# Altium PCB KEY.PcbDoc
Units mil, origin at the board's own origin, x right, y up, seen from the top; angles counter-clockwise.
Board outline 730.42 x 1605.42 mil, 2 copper layers (Top Layer, Bottom Layer); 11 components, 6 nets, 35 pads, 13 vias.
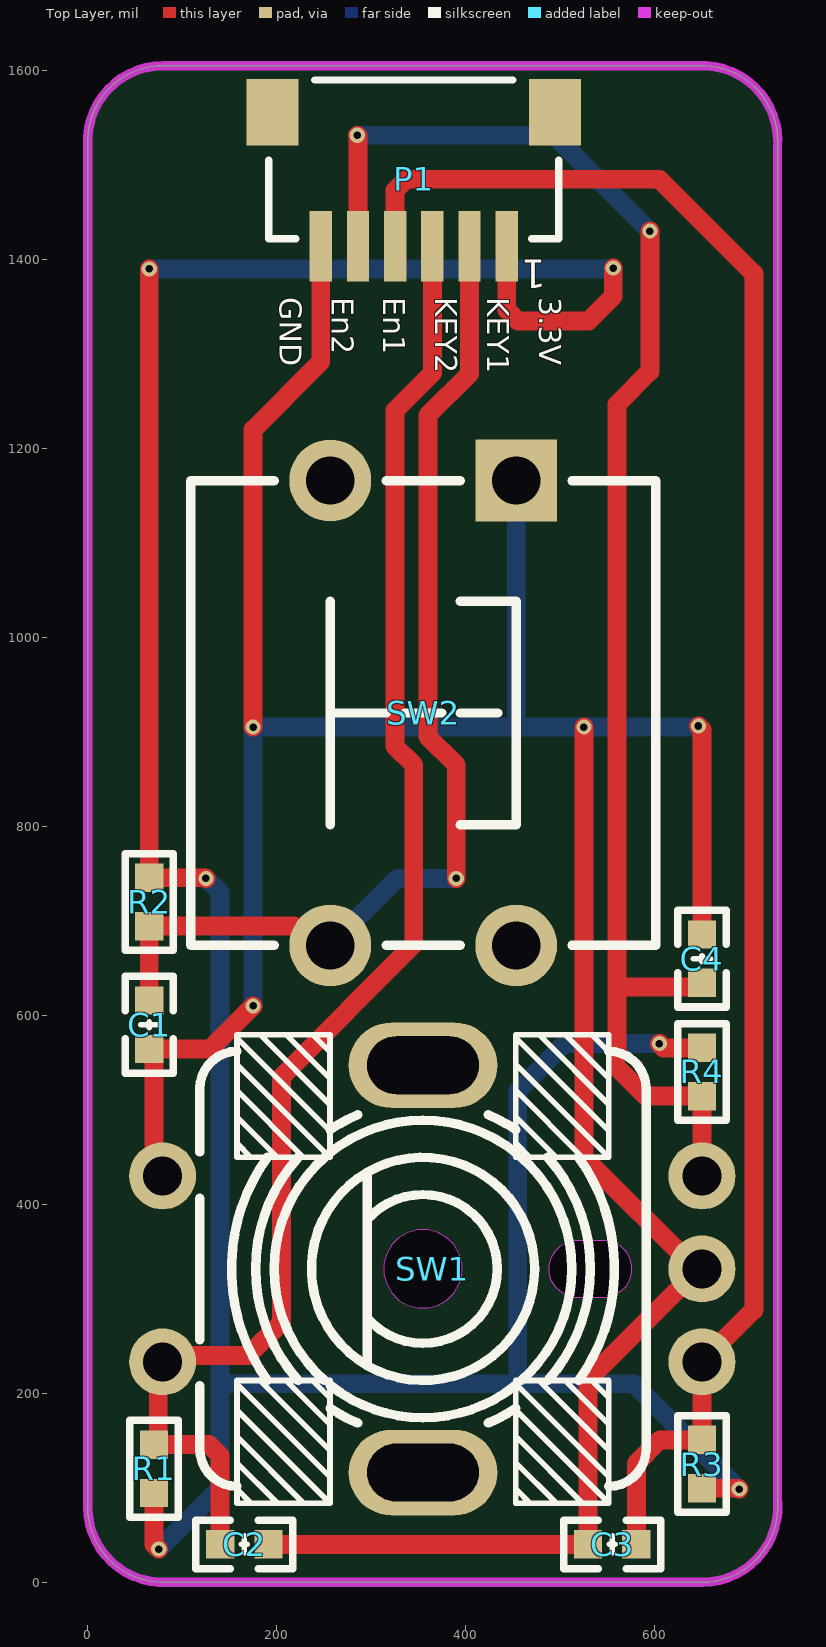
[diagram p0: Top Layer view]
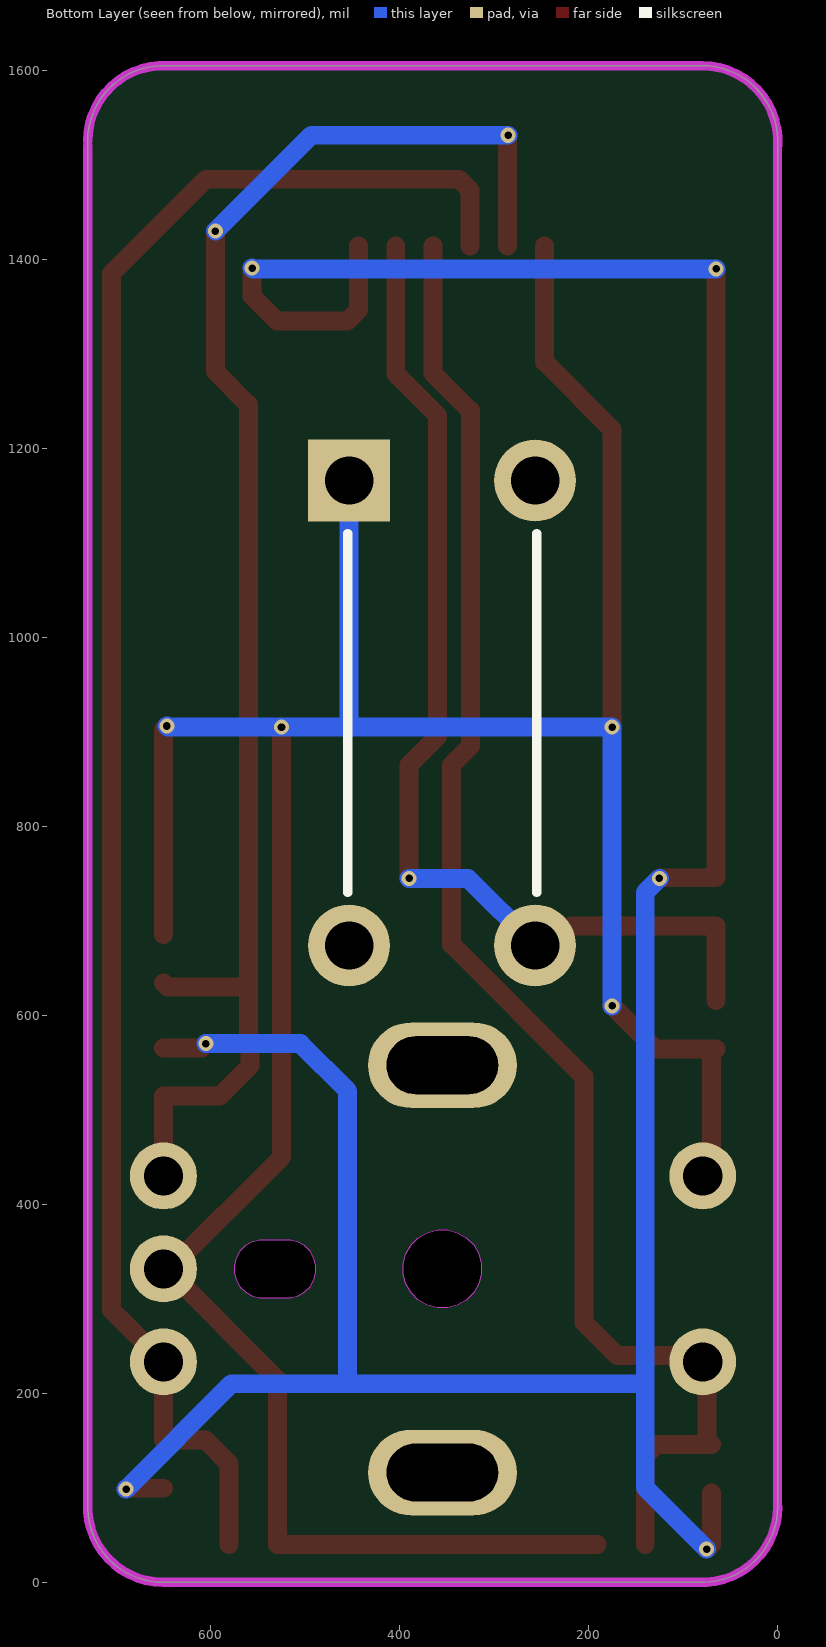
[diagram p1: Bottom Layer view, seen from below]
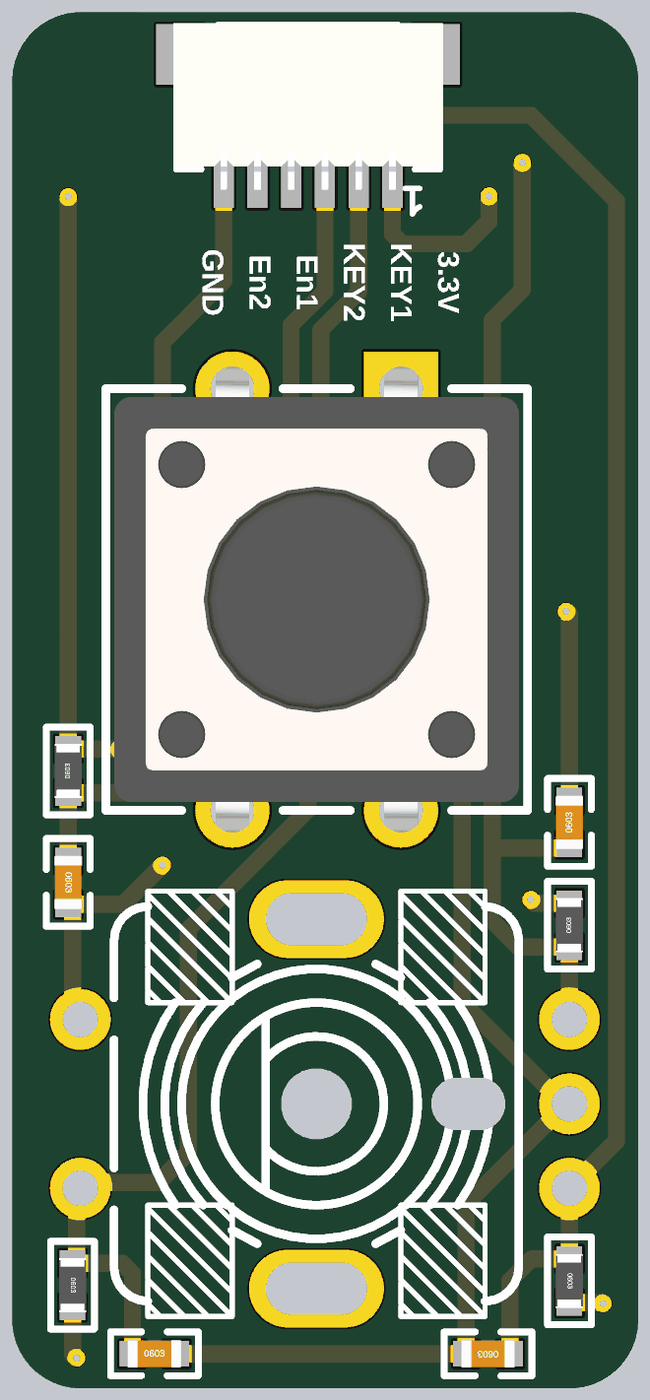
[diagram p2: 3D render of the assembled board from above, using the file's embedded part models]

## Layer stack, top to bottom
Top Solder: solder mask 0.4, Solder Resist, Dk 3.5
Top Layer: signal copper 1.4
Dielectric 1: dielectric 12.6, FR-4, Dk 4.8
Bottom Layer: signal copper 1.4
Bottom Solder: solder mask 0.4, Solder Resist, Dk 3.5

## Board outline
0,79.77 0,1520.51 -0.09,1520.51 cw(c79.77,1525.21) 79.77,1605.21 79.77,1605.12 645.49,1605.12 645.51,1605.09 cw(c650.21,1525.23) 730.21,1525.23 730,1520.61 730,85 730.09,84.49 cw(c650.23,79.79) 650.23,-0.21 650.23,0 84.49,0 84.49,-0.09 cw(c79.79,79.77)

## Design rules (kind name [scope] priority, off if disabled: settings)
Clearance 覆铜与导线距离 [OnLayer('Top Layer') vs InPolygon] p1: gap=10 ignorepadtopadclearanceinfootprint=FALSE
Clearance 板边距 [OnLayer('Keep-Out Layer') vs InPolygon] p2: gap=30 ignorepadtopadclearanceinfootprint=FALSE
Clearance [All] p3: gap=5 ignorepadtopadclearanceinfootprint=FALSE
ComponentClearance [All] p1: gap=0 collisioncheckmode=3 verticalgap=0 showdistances=FALSE
DiffPairsRouting [All] p1: maxlimit=9 minlimit=9 mostfreqgap=9 toplayer_minwidth=4 toplayer_maxwidth=4 toplayer_prefwidth=4 bottomlayer_minwidth=4 bottomlayer_maxwidth=4 bottomlayer_prefwidth=4 maxuncoupledlength=500
FanoutControl Fanout_BGA [All] p1: bgadir=Out bgaviamode=Centered fanoutstyle=Auto fanoutdirection=Alternating viagrid=1 // Fanout_BGA (Default Rule)
HoleSize [All] p1: absolutevalues=TRUE maxlimit=10000 minlimit=8 maxpercent=80.000 minpercent=20.000
MinimumSolderMaskSliver [All] p1 off: minsoldermaskwidth=2
PlaneConnect [All] p1: planeconnectstyle=Direct reliefexpansion=20 reliefentries=4 reliefconductorwidth=10 reliefairgap=10
PolygonConnect [All] p1: connectstyle=Direct reliefconductorwidth=10 reliefentries=4 polygonreliefangle="90 Angle" airgapwidth=10
RoutingVias [All] p1: holewidth=8 width=16 viastyle="Through Hole" minholewidth=6 minwidth=12 maxholewidth=200 maxwidth=200
SilkToSilkClearance [All] p1: silktosilkclearance=0
SilkToSolderMaskClearance [IsPad] p1: minsilkscreentomaskgap=0 clearancetoexposedcopper=TRUE
SolderMaskExpansion [All] p1: expansion=3 istentingtop=FALSE
Width [All] p1: maxlimit=10000 minlimit=4 preferedwidth=20 minimp=50.000000 maximp=50.000000 favimp=50.000000
22 further rules are at their usual default settings.

## Components (designator, comment, footprint, x,y, rotation, side; value= is the part's Value field where it differs from the comment)
C1 "0.1uF" C0603_L 65,590 r270 top
C2 "0.1uF" C0603_L 165.59,40 r0 top
C3 "0.1uF" C0603_L 555,40 r180 top
C4 "0.1uF" C0603_L 650,660 r90 top
P1 "SH1.0 6P" "SH 1.0-WS-6P" 345,1485 r180 top
R1 "10K" R0603_L 70,120 r270 top
R2 "10K" R0603_L 65,720 r90 top
R3 "10K" R0603_L 650,125 r270 top
R4 "10K" R0603_L 650,540 r90 top
SW1 "EC11K1524406" "SW-TH_EC11K1524406 - duplicate" 364.57,331.58 r90 top locked
SW2 "12x12x5" "SW DIP-12*12*4.3" 355,920 r270 top

## Footprints (in the part's own frame and the unit in brackets; to place one, negate y for a bottom-side part, rotate by r counter-clockwise, add the part's x,y. Pads: shape width x height; smd on the part's side, far side on the other; paste and mask are expansions set on the pad)
C0603_L [mil] "无极性贴片电容"
  rect 30x30 smd: 1(-25.59,0) 2(25.59,0)
  silkscreen extent -51,-26 51,26, body extent -31,-16 32,16, height 33
R0603_L [mil] "1/10W贴片电阻"
  rect 30x30 smd: 1(-25.59,0) 2(25.59,0)
  silkscreen extent -51,-26 51,26, body extent -31,-16 32,16, height 16
"SH 1.0-WS-6P" [mm]
  rect 1.4x1.8 smd: 0(-3.8,-1.8) 0(3.8,-1.8)
  rect 0.6x1.9 smd: 1(-2.5,1.8) 2(-1.5,1.8) 3(-0.5,1.8) 4(0.5,1.8) 5(1.5,1.8) 6(2.5,1.8)
  silkscreen extent -3.9,-2.67 3.9,1.6, body extent -4,-2.73 4,2.22, height 2.9
"SW DIP-12*12*4.3" [mm] "12*12*4.3mm                                 淘宝ID:黄晶宝石"
  rect 2.2x2.2 hole 1.3: 1(-6.25,2.5)
  round 2.2 hole 1.3: 2(-6.25,-2.5) 3(6.25,-2.5) 4(6.25,2.5)
  silkscreen extent -6.25,-6.25 6.25,6.25, body extent -6.9,-6 6.9,6, height 4.45
"SW-TH_EC11K1524406 - duplicate" [mm]
  round 1.8 hole 1.05 mask+0.051: A(-2.5,-7.25) B(2.5,-7.25) C(0,-7.25) D(-2.5,7.25) E(2.5,7.25)
  oval 2.3x4 hole 1.55 slot 3 at 90 deg copper offset 0,0 mask+0.051: MH1(-5.475,0.25)
  oval 2.3x4 hole 1.55 slot 3 at 90 deg mask+0.051: MH2(5.475,0.25)
  Keep-Out Layer board cut-out: 0.775,-4.575 0.775,-4.677 0.722,-4.874 0.62,-5.051 0.476,-5.195 0.299,-5.297 0.102,-5.35 -0.102,-5.35 -0.299,-5.297 -0.476,-5.195 -0.62,-5.051 -0.722,-4.874 -0.775,-4.677 -0.775,-4.575 -0.775,-4.575 -0.775,-3.925 -0.775,-3.823 -0.722,-3.626 -0.62,-3.449 -0.476,-3.305 -0.299,-3.203 -0.102,-3.15 0.102,-3.15 0.299,-3.203 0.476,-3.305 0.62,-3.449 0.722,-3.626 0.775,-3.823 0.775,-3.925 0.775,-3.925 0.775,-4.575
  Keep-Out Layer board cut-out: 1.05,0.25 1.05,0.388 0.978,0.655 0.84,0.895 0.645,1.09 0.405,1.228 0.138,1.3 -0.138,1.3 -0.405,1.228 -0.645,1.09 -0.84,0.895 -0.978,0.655 -1.05,0.388 -1.05,0.25 -1.05,0.112 -0.978,-0.155 -0.84,-0.395 -0.645,-0.59 -0.405,-0.729 -0.138,-0.8 0.138,-0.8 0.405,-0.729 0.645,-0.59 0.84,-0.395 0.978,-0.155 1.05,0.112 1.05,0.25 1.05,0.25
  silkscreen extent -6.3,-5.75 6.3,6.25

## Part data
C1 C2 C3 C4: library part C, "贴片电容", BOM名称=无极性贴片电容, 联系卖家，免费查找封装=唯一出售店铺网址https://shop463601444.taobao.com
P1: library part "Header 6", "Header, 6-Pin", LatestRevisionDate=17-Jul-2002, LatestRevisionNote="Re-released for DXP Platform.", Publisher="Altium Limited"
R1 R2 R3 R4: library part R, "贴片电阻", BOM名称=贴片电阻, 封装库来自淘宝卖家ID：黄晶宝石=其他店铺购入均为盗版假冒封装库，请立即申请退款, 联系卖家，免费查找封装=唯一出售店铺网址https://shop463601444.taobao.com
SW1: JLCPCB Part Class="Extended Part", LCSC Part Name=编码器, Manufacturer=ALPSALPINE(阿尔卑斯阿尔派), Add into BOM=yes, Convert to PCB=yes, Datasheet=https://atta.szlcsc.com/upload/public/pdf/source/20190620/C398934_DDD5BF6D843226194F24C74B1929B82F.pdf, Device=EC11K1524406, Manufacturer Part=EC11K1524406, Name=EC11K1524406, Supplier=LCSC, Supplier Footprint=插件, Supplier Part=C398934, Symbol=EC11K1524406
SW2: library part "TSW DIP-12x12", "直插12x12轻触开关", BOM名称=直插12x12轻触开关, 联系卖家，免费查找封装=唯一出售店铺网址https://shop463601444.taobao.com

## Via types
v1: diameter 16, hole 8, Top Layer to Bottom Layer, 13 vias

## Nets (pads, with @x,y where several pads share a name; then routed paths per layer and width w, separated by ;. In a path a pad name is that pad's centre, name@x,y a point inside that pad or via, vN(x,y) a via of type N, cw(c..) or ccw(c..) an arc to the next point about the centre after c; other vN are vias at no path point)
+3.3V: P1.1 R1.2 R2.2 R3.2 R4.2 | length 3389.4
  Top Layer w20: v1(65,1390) R2.2 124.41,745.59 v1(125,745) ; R1.2 70,40 v1(75,35) ; P1.1 443.43,1346.72 455.14,1335 530,1335 556.14,1361.14 v1(556.14,1390.96) ; v1(605,570) 609.41,565.59 R4.2 ; R3.2 688.6,99.41 v1(689.46,98.55)
  Bottom Layer w20: v1(65,1390) 555.18,1390 v1(556.14,1390.96) ; v1(75,35) 140,100 140,210 ; v1(125,745) 140,730 140,210 ; v1(605,570) 505,570 455,520 455,210 ; v1(689.46,98.55) 578.01,210 455,210 ; 140,210 455,210
Encode1: C3.1 P1.4 R3.1 SW1.A | length 1907.6
  Top Layer w20: P1.4 325.32,1473.28 337.03,1485 605,1485 705,1385 705,288.15 SW1.A R3.1 605.59,150.59 580.59,125.59 C3.1
Encode2: C4.1 P1.5 R4.1 SW1.B | length 1649.4
  Top Layer w20: v1(285.22,1531.58) 285.95,1530.85 P1.5 ; v1(595,1430) 595,1281.51 560,1246.51 560,630 ; SW1.B R4.1 590.59,514.41 558.28,546.72 558.28,563.28 560,565 560,630 ; C4.1 645.6,630 560,630
  Bottom Layer w20: v1(285.22,1531.58) 493.42,1531.58 v1(595,1430)
GND: C1.2 C2.2 C3.2 C4.2 P1.6 SW1.C SW1.E SW2.1 | length 3365.4
  Top Layer w20: SW1.E 70,439.15 70,559.41 C1.2 129.41,564.41 v1(175,610) ; v1(175,905) 175,1220 246.57,1291.57 P1.6 ; C2.2 C3.2 529.41,214.41 SW1.C@646.57,331.57 ; v1(525,905) 525,450 643.43,331.57 SW1.C@646.57,331.57 ; v1(646.25,906.25) 650,902.5 C4.2 ; SW1.C SW1.C@646.57,331.57
  Bottom Layer w20: v1(175,610) v1(175,905) 453.43,905 ; SW2.1 453.43,905 ; v1(646.25,906.25) 645,905 v1(525,905) 453.43,905
KEY1: C1.1 P1.2 R2.1 SW2.3 | length 1141.5
  Top Layer w20: C1.1 R2.1 218.08,694.41 238.55,673.94 SW2.3 ; v1(390,745) 390,865 360,895 360,1235 404.05,1279.06 P1.2
  Bottom Layer w20: SW2.3 327.64,745 v1(390,745)
KEY2: C2.1 P1.3 R1.1 SW1.D | length 1625.1
  Top Layer w20: C2.1 140,133.88 128.28,145.59 R1.1 74.57,150.17 74.57,228.57 SW1.D 86,240 170,240 205,275 205,535 345,675 345,865 325,885 325,1240 364.68,1279.69 P1.3
pads on no net: P1.0 SW1.MH1 SW1.MH2 SW2.2 SW2.4

## Keep-outs
Keep-Out Layer:
  lines w10: -0.21,79.77 ccw(c79.79,79.77) 84.49,-0.09 ; -0.09,1520.51 cw(c79.77,1525.21) 79.77,1605.21 ; 0,79.77 0,1520.51 ; 79.77,1605.12 645.49,1605.12 cw(c650.21,1525.23) 730.21,1525.23 ; 84.49,0 650.23,0 ; 650.23,-0.21 ccw(c650.23,79.79) 730.09,84.49 ; 730,85 730,1520.61

## Silkscreen, mask and mechanical layers (free items; w line width, h text height)
Top Overlay:
  text "GND" at 195,1360.19 h40 r270
  text "En2" at 250,1360.19 h40 r270
  text "En1" at 305,1360.19 h40 r270
  text "KEY2" at 360,1360 h40 r270
  text "KEY1" at 415,1360 h40 r270
  text "3.3V" at 470,1360 h40 r270
Mechanical 1:
  lines w10: -0.21,79.77 ccw(c79.79,79.77) 84.49,-0.09 84.49,0 650.23,0 650.23,-0.21 ccw(c650.23,79.79) 730.09,84.49 730,85 730,1520.61 730.21,1525.23 ccw(c650.21,1525.23) 645.51,1605.09 ; 0,79.77 0,1520.51 -0.09,1520.51 cw(c79.77,1525.21) 79.77,1605.21 79.77,1605.12 645.49,1605.12 ; 645.49,1605.12 645.51,1605.09 ; 313.39,326.14 316.21,315.63 321.65,306.2 329.35,298.5 338.78,293.06 349.29,290.24 354.73,290.24 360.17,290.24 370.69,293.06 380.11,298.5 387.81,306.2 393.25,315.63 396.07,326.14 396.07,337.02 393.25,347.54 387.81,356.96 380.11,364.66 370.69,370.1 360.17,372.92 354.73,372.92 349.29,372.92 338.78,370.1 329.35,364.66 321.65,356.96 316.21,347.54 313.39,337.02 313.39,326.14 ; 488.59,327.57 488.59,335.6 490.67,343.36 494.68,350.32 500.36,356 507.32,360.01 515.08,362.09 519.1,362.09 544.69,362.09 548.7,362.09 556.47,360.01 563.42,356 569.1,350.32 573.12,343.36 575.2,335.6 575.2,327.57 573.12,319.8 569.1,312.85 563.42,307.17 556.47,303.15 548.7,301.07 544.69,301.07 519.1,301.07 515.08,301.07 507.32,303.15 500.36,307.17 494.68,312.85 490.67,319.8 488.59,327.57
Drill Drawing:
  circle w10: c32.74,2259.09 r33.33
  lines w10: -0.6,2092.42 16.07,2092.42 32.74,2075.76 49.4,2092.42 66.07,2092.42 49.4,2109.09 66.07,2125.76 49.4,2125.76 32.74,2142.42 16.07,2125.76 -0.6,2125.76 16.07,2109.09 -0.6,2092.42 ; -0.6,2442.42 66.07,2442.42 32.74,2375.76 -0.6,2442.42 ; -0.6,2525.76 66.07,2525.76 66.07,2592.42 -0.6,2592.42 -0.6,2525.76
  lines w15: -60.39,2030.76 12877.99,2030.76 ; -60.39,2630.76 12877.99,2630.76 ; 490.49,1880.76 490.49,2780.76 ; 1030.35,1880.76 1030.35,2780.76 ; 2110.03,1880.76 2110.03,2780.76 ; 2615.91,1880.76 2615.91,2780.76 ; 3349.71,1880.76 3349.71,2780.76 ; 4849.26,1880.76 4849.26,2780.76 ; 5439.11,1880.76 5439.11,2780.76 ; 6184.91,1880.76 6184.91,2780.76 ; 6834.74,1880.76 6834.74,2780.76 ; 7688.5,1880.76 7688.5,2780.76 ; 9022.11,1880.76 9022.11,2780.76 ; 10355.72,1880.76 10355.72,2780.76 ; 11475.39,1880.76 11475.39,2780.76 ; -60.39,1880.76 12877.99,1880.76 12877.99,2780.76 -60.39,2780.76 -60.39,1880.76
  text "Symbol" at 29.61,2675.76 h72
  text "Count" at 535.49,2675.76 h72
  text "Hole Size" at 1075.35,2675.76 h72
  text "Plated" at 2155.03,2675.76 h72
  text "Hole Type" at 2660.91,2675.76 h72
  text "Drill Layer Pair" at 3394.71,2675.76 h72
  text "Via/Pad" at 4894.26,2675.76 h72
  text "Pad Shape" at 5484.11,2675.76 h72
  text "Template" at 6229.91,2675.76 h72
  text "Description" at 6879.74,2675.76 h72
  text "Hole Tolerance (+)" at 7733.5,2675.76 h72
  text "Hole Tolerance (-)" at 9067.11,2675.76 h72
  text "Hole Length" at 10400.72,2675.76 h72
  text "Routed Path Length" at 11520.39,2675.76 h72
  text "2" at 535.49,2525.76 h60
  text "61.02mil (1.550mm)" at 1075.35,2525.76 h60
  text "PTH" at 2155.03,2525.76 h60
  text "Slot" at 2660.91,2525.76 h60
  text "Top Layer - Bottom Layer" at 3394.71,2525.76 h60
  text "Pad" at 4894.26,2525.76 h60
  text "Rounded" at 5484.11,2525.76 h60
  text "(Mixed)" at 6229.91,2525.76 h60
  text "118.11mil (3.000mm)" at 10400.72,2525.76 h60
  text "57.09mil (1.450mm)" at 11520.39,2525.76 h60
  text "4" at 535.49,2375.76 h60
  text "51.18mil (1.300mm)" at 1075.35,2375.76 h60
  text "PTH" at 2155.03,2375.76 h60
  text "Round" at 2660.91,2375.76 h60
  text "Top Layer - Bottom Layer" at 3394.71,2375.76 h60
  text "Pad" at 4894.26,2375.76 h60
  text "(Mixed)" at 5484.11,2375.76 h60
  text "(Mixed)" at 6229.91,2375.76 h60
  text "-" at 10400.72,2375.76 h60
  text "-" at 11520.39,2375.76 h60
  text "5" at 535.49,2225.76 h60
  text "41.34mil (1.050mm)" at 1075.35,2225.76 h60
  text "PTH" at 2155.03,2225.76 h60
  text "Round" at 2660.91,2225.76 h60
  text "Top Layer - Bottom Layer" at 3394.71,2225.76 h60
  text "Pad" at 4894.26,2225.76 h60
  text "Rounded" at 5484.11,2225.76 h60
  text "(Mixed)" at 6229.91,2225.76 h60
  text "-" at 10400.72,2225.76 h60
  text "-" at 11520.39,2225.76 h60
  text "13" at 535.49,2075.76 h60
  text "8.00mil (0.203mm)" at 1075.35,2075.76 h60
  text "PTH" at 2155.03,2075.76 h60
  text "Round" at 2660.91,2075.76 h60
  text "Top Layer - Bottom Layer" at 3394.71,2075.76 h60
  text "Via" at 4894.26,2075.76 h60
  text "Rounded" at 5484.11,2075.76 h60
  text "v41h20" at 6229.91,2075.76 h60
  text "-" at 10400.72,2075.76 h60
  text "-" at 11520.39,2075.76 h60
  text "24 Total" at 535.49,1925.76 h60
  text "Slot definitions :" at 29.61,1780.78 h60
  text "Routed Path Length" at 1062.3,1780.78 h60
  text "= Calculated from tool start centre position to tool end centre position." at 2164.97,1780.78 h60
  text "Hole Length" at 1062.3,1680.81 h60
  text "= Routed Path Length + Tool Size = Slot length as defined in the PCB layout" at 1755.1,1680.81 h60

## Dimensions
-20,0 to -30,1605 on Mechanical 1
0,-20 to 730,-10 on Mechanical 1

## Text inside footprints (layer, text, board x,y; h text height)
P1: Top Overlay "1" at 485,1400 h30 r180